# EAGLE board Main_Body_PCB_V4 (EAGLE 9.6.2)
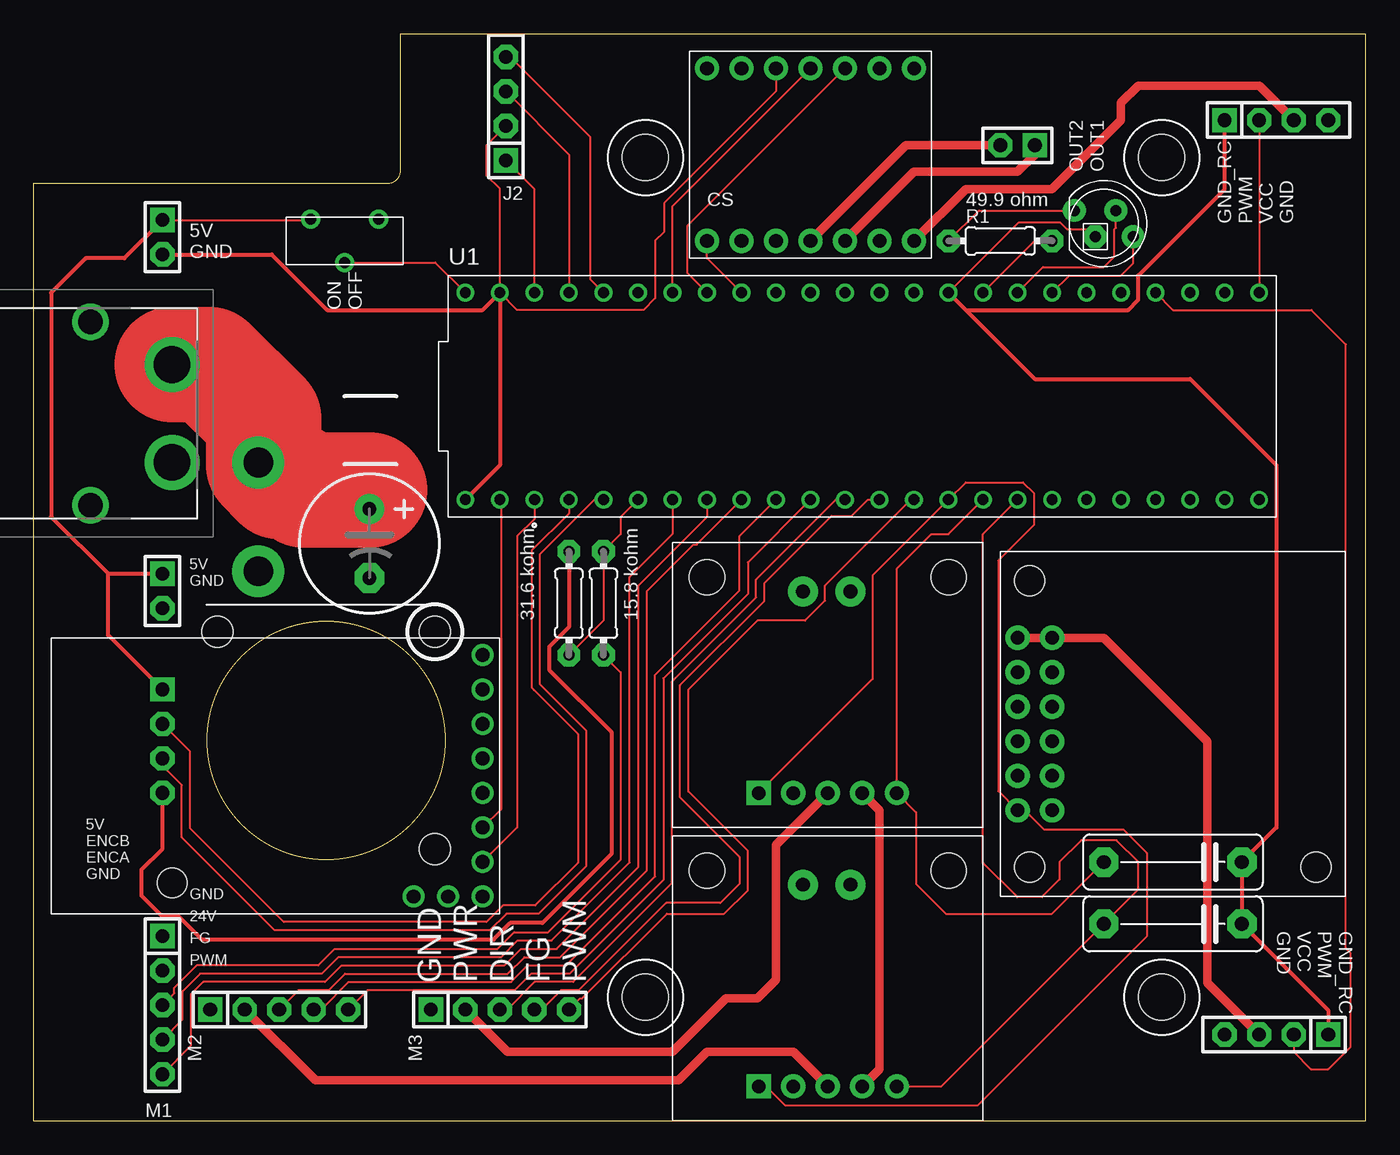
[diagram p0: board, top side]
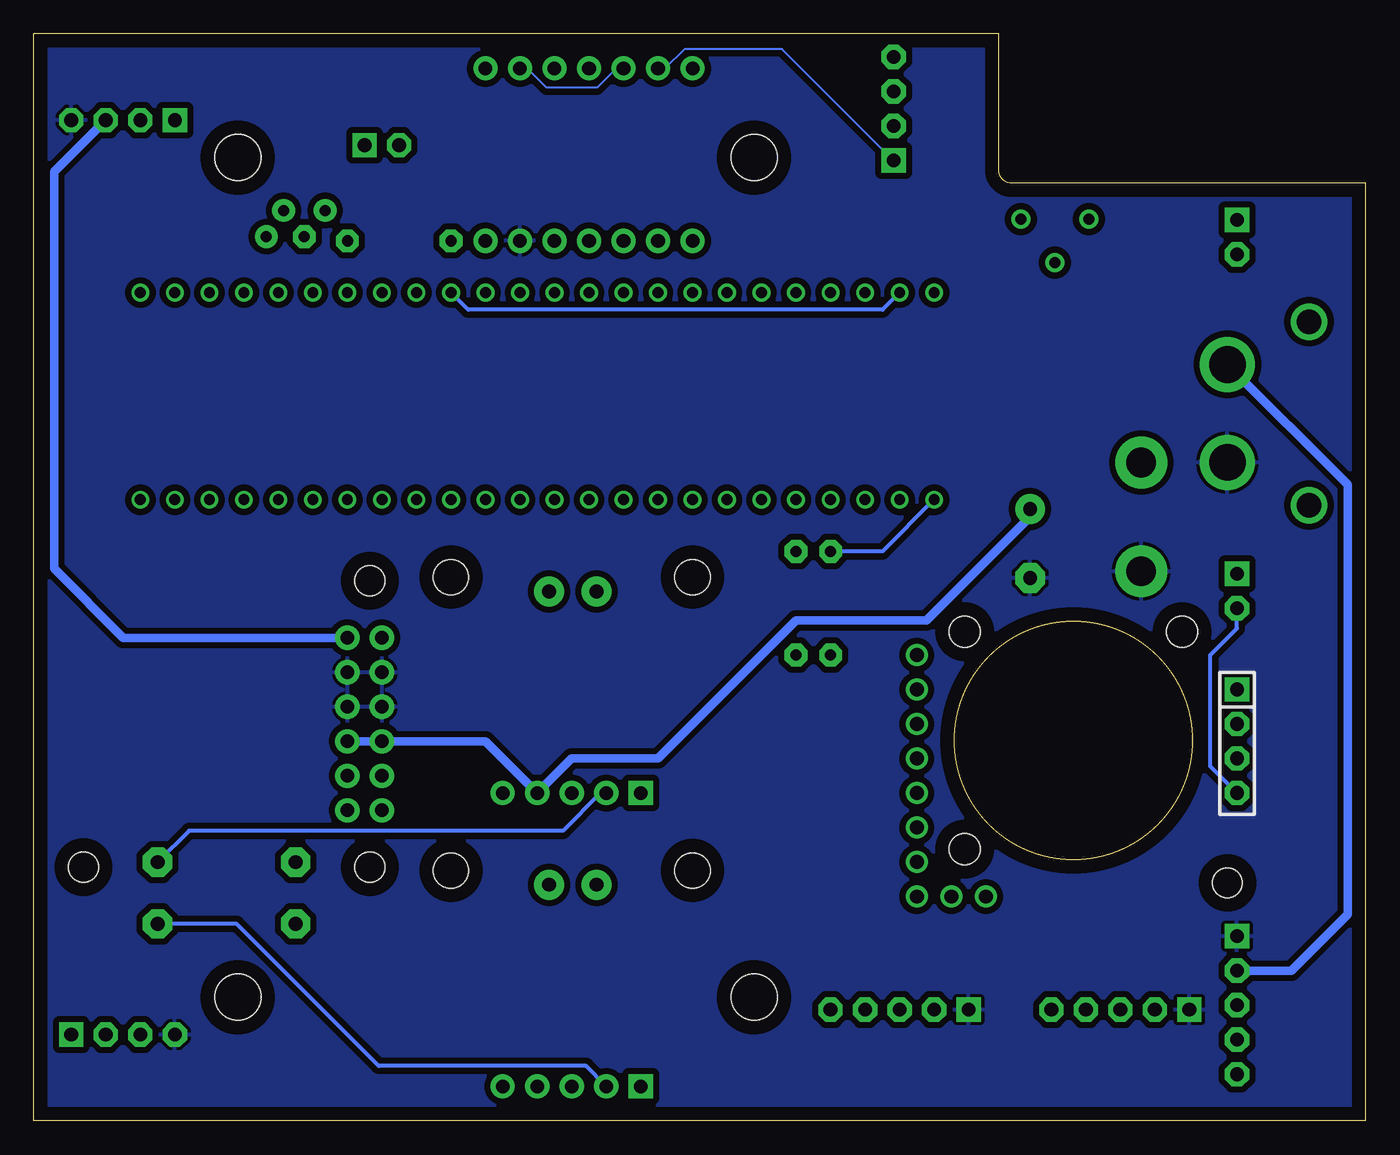
[diagram p1: board, bottom side, seen from below]

Size 98 x 80 mm. Coordinates in mm from the lower left corner, seen from the top.
Outline: 0,0 0,69 26,69 arc90 27,70 27,80 98,80 98,0 0,0
Outline: circle at 21.5,28 radius 8.75
Copper layers (1*16): Top 0.035mm / dielectric 1.5mm / Bottom 0.035mm
Design rules "default *": minimum track width 6mil, minimum drill 0.35mm, track to track 18mil, track to pad 18mil, pad to pad 6mil, via to via 6mil, smd to smd 6mil, copper to edge 40mil, drill to drill 6mil, minimum pad ring 10mil, minimum via ring 8mil, stop-mask expansion 4mil, vias tented up to drill 0mil, thermal gap 10mil
Holes 3.4 mm at 45,9.1 83,9.1 45,70.9 83,70.9
Holes 2.3 mm at 29.5,36 13.5,36 29.5,20

## Footprints (pad centres in the part's own frame; a part is rotated, then mirrored left to right if it is on the bottom)
C10B4 = drill 1.016 pad 2.159 octagon: 1 -5.08,0; 2 5.08,0
CE-050X100 = drill 1.016 pad 2.184: + -2.54,0 | drill 1.016 pad 2.184 octagon: - 2.54,0
XT60PWM = drill 1.8 pad 2.7: 1 -6.75,6; 2 6.75,6 | drill 2.7 pad 4.05: 24V 3.6,0; GND -3.6,0
SIP-100-04-40_PPTC041LGBN-RC = drill 1.016 pad 1.778 square: 3.3V 0,3.81 | drill 1.016 pad 1.778 octagon: CANRX 0,-1.27; CANTX 0,-3.81; GND 0,1.27
SIP-100-05-40 = drill 1.016 pad 1.778 square: 1 -5.08,0 | drill 1.016 pad 1.778 octagon: 2 -2.54,0; 3 0,0; 4 2.54,0; 5 5.08,0
SIP-100-02-40 = drill 1.016 pad 1.778 square: 1 -1.27,0 | drill 1.016 pad 1.778 octagon: 2 1.27,0
SIP-100-04-40 = drill 1.016 pad 1.778 square: 1 -3.81,0 | drill 1.016 pad 1.778 octagon: 2 -1.27,0; 3 1.27,0; 4 3.81,0
0204/7 = drill 0.813 pad 1.676 octagon: 1 -3.81,0; 2 3.81,0
MODULE_DEV-16771 = drill 0.8: 0 -26.67,-7.62; 1 -24.13,-7.62; 2 -21.59,-7.62; 3 -19.05,-7.62; 3.3V_1 6.35,-7.62; 3.3V_2 -24.13,7.62; 4 -16.51,-7.62; 5 -13.97,-7.62; 6 -11.43,-7.62; 7 -8.89,-7.62; 8 -6.35,-7.62; 9 -3.81,-7.62; 10 -1.27,-7.62; 11 1.27,-7.62; 12 3.81,-7.62; 13 3.81,7.62; 14 1.27,7.62; 15 -1.27,7.62; 16 -3.81,7.62; 17 -6.35,7.62; 18 -8.89,7.62; 19 -11.43,7.62; 20 -13.97,7.62; 21 -16.51,7.62; 22 -19.05,7.62; 23 -21.59,7.62; 24 8.89,-7.62; 25 11.43,-7.62; 26 13.97,-7.62; 27 16.51,-7.62; 28 19.05,-7.62; 29 21.59,-7.62; 30 24.13,-7.62; 31 26.67,-7.62; 32 29.21,-7.62; 33 29.21,7.62; 34 26.67,7.62; 35 24.13,7.62; 36 21.59,7.62; 37 19.05,7.62; 38 16.51,7.62; 39 13.97,7.62; 40 11.43,7.62; 41 8.89,7.62; GND1 -29.21,-7.62; GND2 6.35,7.62; GND3 -26.67,7.62; VIN -29.21,7.62
MODULE_POLOLU_2992/2994_MOD = drill 1.02 pad 1.62: 3V3OUT 3.81,-1.27; CS 6.35,-1.27; DIR 16.51,-1.27; FLT 8.89,-1.27; GND 19.05,-3.81; GND2 19.05,-1.27; PWM 13.97,-1.27; SLP 11.43,-1.27; VM 1.27,-1.27; VREF 19.05,-6.35 | hole 2.18: 18.034,-24.13
HOLES_2 = drill 2.18 pad 3.81: 24V -4,0; GND 4,0
LEDWP154A4SUREQBFZGW = drill 0.8 pad 1.676: BLU 0.889,0.968; GRN 2.159,-0.968; RED -2.159,0.968 | drill 0.8 pad 1.676 octagon: GND -0.635,-0.968
MODULE_INA169_BREAKOUT = drill 1 pad 1.778: GND 8.89,2.54; OUT 16.51,2.54; VIN+ 13.97,2.54; VIN- 11.43,2.54 | drill 1 pad 1.778 square: VCC 6.35,2.54 | drill 1 pad 2.184: VIN+L 13.103,17.376; VIN-L 9.603,17.376 | hole 2.6: 2.54,18.43; 20.32,18.43
MODULE_POLOLU_4093 = drill 1 pad 1.778: EN 19.05,1.27; GND1 8.89,3.81; GND2 8.89,1.27; GND3 11.43,3.81; GND4 11.43,1.27; PG 19.05,3.81; VIN1 13.97,3.81; VIN2 13.97,1.27; VOUT1 6.35,3.81; VOUT2 6.35,1.27; VRP1 16.51,3.81; VRP2 16.51,1.27 | hole 2.2: 2.159,2.159; 23.241,2.159; 23.241,23.241
CL-SB-12C-01 = drill 0.8 pad 1.422: 1 -2.5,1.6; 2 0,-1.6; 3 2.5,1.6
MODULE_POLOLU_4036 = drill 1 pad 1.778: CS 13.97,1.27; EN 1.27,11.43; FAULT 13.97,3.81; GND1 1.27,13.97; GND2 13.97,13.97; IMODE 13.97,6.35; OUT1 13.97,11.43; OUT2 13.97,8.89; PH 1.27,8.89; PMODE 1.27,6.35; SLEEP 1.27,3.81; VIN 13.97,16.51; VM 1.27,16.51; VREF 1.27,1.27

## Placement (x,y rotation side)
C1  0.1 uF  [C10B4]  83.82,14.5 180 top
C2  0.1 uF  [C10B4]  83.82,19.05 180 top
C3  330 uF  [CE-050X100]  24.69,42.5 270 top
J1  XT60PW-M  [XT60PWM]  10.16,52.07 90 top
J2  WAVESHARE_SN65HVD230SIP-100-40  [SIP-100-04-40_PPTC041LGBN-RC]  34.73,74.5 180 top
M1  F-1X05-SIP-100-40  [SIP-100-05-40]  9.46,8.52 270 top
M2  F-1X05-SIP-100-40  [SIP-100-05-40]  18.05,8.19 0 top
M3  F-1X05-SIP-100-40  [SIP-100-05-40]  34.29,8.19 0 top
P1  M-1X02-SIP-100-40  [SIP-100-02-40]  9.46,39 270 top
P2  M-1X04-SIP-100-40  [SIP-100-04-40]  9.46,27.94 270 bottom
P3  M-1X02-SIP-100-40  [SIP-100-02-40]  9.46,65.04 270 top
P4  M-1X02-SIP-100-40  [SIP-100-02-40]  72.39,71.81 180 top
R1  49.9 ohm  [0204/7]  71.12,64.77 0 top
R2  15.8 kohm  [0204/7]  41.91,38.1 90 top
R3  31.6 kohm  [0204/7]  39.37,38.1 90 top
SERVOLEFT  F-1X04-SIP-100-40  [SIP-100-04-40]  91.44,73.66 0 top
SERVORIGHT  F-1X04-SIP-100-40  [SIP-100-04-40]  91.44,6.35 180 top
U1  DEV-16771  [MODULE_DEV-16771]  60.96,53.34 0 top
U$1  POLOLU_MOTORDRIVER_18V25_MOD  [MODULE_POLOLU_2992/2994_MOD]  34.29,35.56 270 top
U$2  HOLES_2  [HOLES_2]  16.51,44.45 270 top
U$3  KINGBRIGHT_LED  [LEDWP154A4SUREQBFZGW]  78.74,66.04 0 top
U$4  INA169_BREAKOUT  [MODULE_INA169_BREAKOUT]  46.99,0 0 top
U$5  INA169_BREAKOUT  [MODULE_INA169_BREAKOUT]  46.99,21.59 0 top
U$6  POLOLU_12V_STEPDOWN_D36V50F12  [MODULE_POLOLU_4093]  71.12,41.91 270 top
U$7  CL-SB-12C-01  [CL-SB-12C-01]  22.86,64.77 0 top
U$8  POLOLU_MOTORDRIVER_DRV8876  [MODULE_POLOLU_4036]  48.26,78.74 270 top

## Library data of the parts
C1 C2 = capacitor-wima
C3 = rc-master
J1 = Prune_Bot_V1; DESCRIPTION: Socket; DC supply; XT60; male; PIN: 2; on PCBs; THT; Colour: yellow; HEIGHT: 8.4mm; MANUFACTURER_NAME: Changzou Amass Elec; MANUFACTURER_PART_NUMBER: XT60PW-M
J2 U$1-U$8 = Prune_Bot_V1
M1-M3 P1-P4 SERVOLEFT SERVORIGHT = con-headers-jp
R1-R3 = adafruit
U1 = Prune_Bot_V1; AVAILABILITY: In Stock; DESCRIPTION: RT1062 Teensy 4.1 i.MX ARM® Cortex®-M7 MPU Embedded Evaluation Board; MF: SparkFun Electronics; MP: DEV-16771; PACKAGE: None; PRICE: None; PURCHASE-URL: https://pricing.snapeda.com/search/part/DEV-16771/?ref=eda

## Nets
+3V3: U1.3.3V_1 U$4.VCC U$5.VCC U$6.EN
+5V: P1.1 P2.1 P3.1 U$7.1
+12V: SERVOLEFT.3 SERVORIGHT.3 U$6.VOUT1 U$6.VOUT2 U$8.VIN
+24V: C3.+ J1.24V M1.2 U$2.24V U$4.VIN+ U$5.VIN+ U$6.VIN1 U$6.VIN2
CAN_VCC: J2.3.3V U1.3.3V_2 U$8.SLEEP
CANRX: J2.CANRX U1.23
CANTX: J2.CANTX U1.22
CS_LATCH: U1.18 U$8.CS
CURR_M2: C1.2 U1.25 U$4.OUT
CURR_M3: C2.2 U1.24 U$5.OUT
DIR_M1: U1.1 U$1.DIR
DIR_M2: M2.3 U1.7
DIR_M3: M3.3 U1.10
DIR_M4: M1.5 U1.6
EN_LATCH: U1.19 U$8.EN
ENCA1: P2.3 U1.3
ENCB1: P2.2 U1.2
FG_M2: M2.4 U1.8
FG_M3: M3.4 U1.11
FG_M4: R2.2 R3.1 U1.4
GND1: C3.- J1.GND M1.1 M2.1 M3.1 SERVOLEFT.4 SERVORIGHT.4 U$2.GND U$6.GND1 U$6.GND2 U$6.GND3 U$6.GND4 U$8.GND2
GND2: C1.1 C2.1 J2.GND P1.2 P2.4 P3.2 R3.2 SERVOLEFT.1 SERVORIGHT.1 U1.GND1 U1.GND2 U1.GND3 U$3.GND U$4.GND U$5.GND U$8.GND1 U$8.PMODE
N$1: U1.VIN U$7.2
N$2: U1.40 U$3.BLU
N$3: R1.1 U$3.RED
N$4: M1.3 R2.1
N$7: R1.2 U1.41
N$8: U1.39 U$3.GRN
N$11: P4.1 U$8.OUT1
N$12: P4.2 U$8.OUT2
PH_LATCH: U1.20 U$8.PH
PWM_M1: U1.0 U$1.PWM
PWM_M2: M2.5 U1.9
PWM_M3: M3.5 U1.12
PWM_M4: M1.4 U1.5
PWM_S2: SERVOLEFT.2 U1.33
PWM_S3: SERVORIGHT.2 U1.36
VIN_M2: M2.2 U$4.VIN-
VIN_M3: M3.2 U$5.VIN-

## Tracks (layer width: path | path; a pad name or v marks a point on that pad's centre or on a via)
+3V3
  Top 0.152: U$4.VCC 53.87,2.54 55.29,1.12 69.44,1.12 81.89,13.57 81.89,19.71 80.16,21.44 74.34,21.44 72.92,22.86 U$6.EN 70.97,24.28 70.97,41.23 73.58,43.84 73.58,46.21 72.8,46.99 68.58,46.99 U1.3.3V_1 61.72,40.13 61.72,32.51 U$5.VCC
+5V
  Top 0.152: P3.1 20.3,66.31 U$7.1
  Top 0.305: P3.1 6.65,63.5 3.81,63.5 1.27,60.96 1.27,44.45 5.45,40.27 | 5.45,40.27 P1.1 | P2.1 5.45,35.76 5.45,40.27
+12V
  Top 0.61: U$6.VOUT2 U$6.VOUT1 78.74,35.56 86.36,27.94 86.36,10.16 SERVORIGHT.3 | U$8.VIN 68.58,68.58 74.93,68.58 80.01,73.66 80.01,74.93 81.28,76.2 90.17,76.2 SERVOLEFT.3
  Bottom 0.61: U$6.VOUT1 91.44,35.56 96.52,40.64 96.52,69.85 SERVOLEFT.3
+24V
  Top 0.305: C3.+ 24.69,46.44
  Top 0.61: C3.+ 17.97,45.72 16.51,47.18 U$2.24V | U$5.VIN+ 62.23,22.86 62.23,3.81 U$4.VIN+
  Top 8.5: J1.24V 12.91,55.67 16.89,51.69 16.89,48.26 18.09,47.06 19.25,47.06 19.87,46.44 24.69,46.44
  Bottom 0.61: J1.24V 1.32,46.83 1.32,15.19 5.45,11.06 M1.2 | C3.+ 24.69,44.45 32.31,36.83 41.91,36.83 52.07,26.67 58.42,26.67 U$5.VIN+ 64.77,27.94 U$6.VIN2 U$6.VIN1
CAN_VCC
  Top 0.152: U1.3.3V_2 36.83,68.59 J2.3.3V
  Bottom 0.152: U$8.SLEEP 51.54,77.47 50.12,78.89 42.93,78.89 J2.3.3V
CANRX
  Top 0.152: J2.CANRX 39.37,71.13 U1.23
CANTX
  Top 0.152: J2.CANTX 35.04,78.31 40.93,72.42 40.93,61.94 U1.22
CS_LATCH
  Top 0.152: U1.18 49.53,63.5 U$8.CS
CURR_M2
  Top 0.152: U$4.OUT 66.78,2.54 C1.2 81.28,17.04 81.28,19.05 79.67,20.66 77.08,20.66 75.47,19.05 75.47,17.76 74.19,16.48 72.37,16.48 69.85,19 69.85,43.18 U1.25
CURR_M3
  Top 0.152: C2.2 74.93,15.24 67.12,15.24 64.92,17.44 64.92,22.71 U$5.OUT 63.5,40.64 66.04,43.18 67.31,43.18 U1.24
DIR_M1
  Top 0.152: U$1.DIR 35.56,21.59 35.56,43.03 36.83,44.3 U1.1
DIR_M2
  Top 0.152: M2.3 19.47,9.61 21.68,9.61 22.9,10.83 34.87,10.83 36.09,12.05 38.72,12.05 45.11,18.44 45.11,38.98 48.54,42.41 48.76,42.41 U1.7
DIR_M3
  Top 0.152: M3.3 34.82,8.19 36.85,10.22 39.68,10.22 46.94,17.48 46.94,32.32 53.14,38.52 53.14,39.83 59.03,45.72 U1.10
DIR_M4
  Top 0.152: M1.5 11.55,5.53 11.55,9.3 12.47,10.22 21.43,10.22 22.64,11.44 34.62,11.44 35.84,12.66 38.47,12.66 44.45,18.64 44.45,39.37 49.53,44.45 U1.6
EN_LATCH
  Top 0.152: U1.19 48.11,62.38 48.11,65.89 U$8.EN
ENCA1
  Top 0.152: P2.3 9.46,26.14 10.88,24.72 10.88,20.87 17.72,14.03 33.55,14.03 34.77,15.25 37.14,15.25 40.64,18.75 40.64,28.73 37.24,32.14 37.24,41.72 41.24,45.72 U1.3
ENCB1
  Top 0.152: P2.2 11.49,27.18 11.49,21.53 18.38,14.64 33.3,14.64 34.52,15.86 36.89,15.86 40.03,19 40.03,28.48 36.8,31.71 36.63,31.88 36.63,41.97 39.37,44.71 U1.2
FG_M2
  Top 0.152: U1.8 51.92,43.03 51.92,39.03 45.72,32.83 45.72,17.99 39.17,11.44 36.34,11.44 35.13,10.22 23.15,10.22 21.12,8.19 M2.4
FG_M3
  Top 0.152: M3.4 37.36,8.19 38.78,9.61 40.09,9.61 46.52,16.04 50.52,16.04 51.92,17.44 51.92,19.42 47.55,23.79 47.55,32.07 53.75,38.27 53.75,39.58 58.7,44.53 60.18,44.53 61.37,45.72 U1.11
FG_M4
  Top 0.152: U1.4 43.18,44.45 43.18,43.18 R2.2 41.91,36.83 R3.1
GND1
  pour Bottom: -1.27,69.85 25.4,69.85 25.4,71.12 25.4,81.28 99.06,81.28 99.06,-1.27 97.79,-1.27 -1.27,-1.27
GND2
  Top 0.152: J2.GND 33.31,71.81 33.31,69.58 34.29,68.6 U1.GND3 35.56,59.69 44.86,59.69 45.72,60.55 45.72,64.77 46.38,65.43 46.38,67.56 54.61,75.79 U$8.PMODE | U1.GND2 72.49,66.14 75.51,66.14 76.01,65.64 77.54,65.64 U$3.GND
  Top 0.305: P2.4 9.46,20.02 7.9,18.46 7.9,16.59 9.39,15.1 10.6,15.1 12.35,13.35 33.83,13.35 35.05,14.56 37.42,14.56 42.49,19.63 42.49,28.63 37.92,33.2 37.92,34.89 39.37,36.34 R3.2 | SERVORIGHT.1 95.25,8.15 C1.1 C2.1 91.44,21.59 91.44,48.26 85.09,54.61 73.66,54.61 68.58,59.69 | U1.GND2 68.58,59.69 | 68.58,59.69 80.53,59.69 81.27,60.44 81.27,62.22 87.63,68.58 SERVOLEFT.1 | P3.2 17.51,63.77 21.59,59.69 33.02,59.69 U1.GND3 34.29,48.26 U1.GND1
  Bottom 0.152: U$8.PMODE 55.14,77.47 56.56,76.05 60.28,76.05 61.7,77.47 U$8.GND1
  Bottom 0.305: U1.GND2 66.05,59.7 35.55,59.7 U1.GND3 | R3.2 35.56,41.91 U1.GND1 | P2.4 11.43,26.1 11.43,34.29 9.46,36.26 P1.2 | U$4.GND 57.38,4.04 72.62,4.04 83.08,14.5 C1.1 | U$5.GND 56.3,24.13 59.07,21.36 86.59,21.36 C2.1
N$1
  Top 0.152: U$7.2 29.54,63.17 U1.VIN
N$2
  Top 0.152: U1.40 74.27,62.84 78.74,62.84 79.53,63.63 79.53,65.64 79.63,65.74 U$3.BLU
N$3
  Top 0.152: R1.1 69.55,67.01 U$3.RED
N$4
  Top 0.152: M1.3 10.33,9.39 10.33,9.8 11.96,11.44 20.92,11.44 22.14,12.66 34.12,12.66 35.34,13.88 37.85,13.88 43.18,19.21 43.18,33.02 R2.1
N$7
  Top 0.152: U1.41 73.66,64.77 R1.2
N$8
  Top 0.152: U1.39 76.2,62.23 80.01,62.23 80.9,63.12 U$3.GRN
N$11
  Top 0.61: U$8.OUT1 64.77,69.85 72.39,69.85 73.66,71.12 P4.1
N$12
  Top 0.61: U$8.OUT2 64.19,71.81 P4.2
PH_LATCH
  Top 0.152: U1.20 46.99,67.31 U$8.PH
PWM_M1
  Top 0.152: U$1.PWM 34.36,22.93 34.36,45.65 U1.0
PWM_M2
  Top 0.152: M2.5 24.55,9.61 35.38,9.61 36.6,10.83 39.42,10.83 46.33,17.74 46.33,32.57 52.53,38.78 52.53,41.1 U1.9
PWM_M3
  Top 0.152: M3.5 40.18,9 40.34,9 46.58,15.24 50.8,15.24 52.53,16.97 52.53,19.86 48.16,24.23 48.16,31.75 53.24,36.83 56.76,36.83 58.22,38.29 58.22,39.39 64.55,45.72 U1.12
PWM_M4
  Top 0.152: M1.4 10.94,7.46 10.94,9.55 12.22,10.83 21.17,10.83 22.39,12.05 34.37,12.05 35.59,13.27 38.1,13.27 43.84,19.01 43.84,40.03 46.99,43.18 U1.5
PWM_S2
  Top 0.152: SERVOLEFT.2 U1.33
PWM_S3
  Top 0.152: SERVORIGHT.2 92.71,5.08 93.98,3.81 95.25,3.81 96.91,5.47 96.91,12.35 96.55,12.7 96.55,57.15 94.01,59.69 83.82,59.69 U1.36
VIN_M2
  Top 0.61: M2.2 20.72,2.98 47.43,2.98 49.53,5.08 55.88,5.08 U$4.VIN-
VIN_M3
  Top 0.61: U$5.VIN- 54.61,20.32 54.61,10.39 53.24,9.02 50.93,9.02 46.99,5.08 34.86,5.08 M3.2

## Text on the board
tPlace: OUT2 / OUT1 | CS | 49.9 ohm | 5V / GND | 31.6 kohm | 15.8 kohm | 5V / ENCB / ENCA / GND
tNames: GND_RC / PWM / VCC / GND | 5V / GND | ON / OFF | GND_RC / PWM / VCC / GND | GND / 24V / FG / PWM | GND / PWR / DIR / FG / PWM